# Altium PCB PCB.PcbDoc (part 2 of 2)
Units mil, origin at the board's own origin, x right, y up, seen from the top; angles counter-clockwise.
Board outline 1700 x 700 mil, 4 copper layers (TOP, GND, SIG, BOTTOM), stack 62.441 mil thick; 81 components, 66 nets, 310 pads, 129 vias.
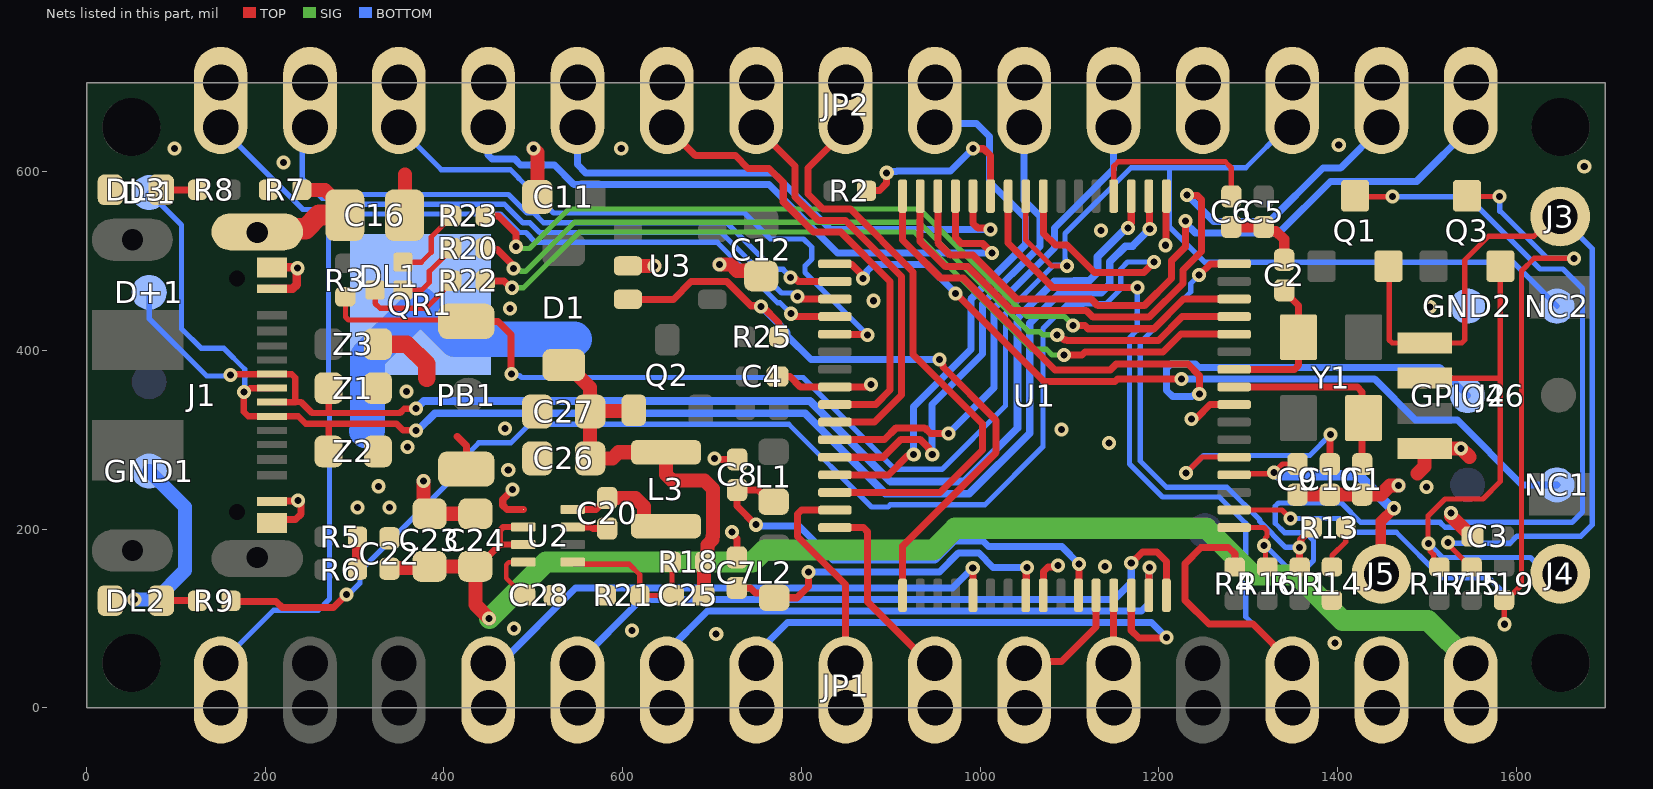
[diagram p4: the nets of this part, all layers, seen from the top]

## Via types
v1: diameter 15.75, hole 7.87, TOP to BOTTOM, tented both sides, 129 vias

## Nets (pads, with @x,y where several pads share a name; then routed paths per layer and width w, separated by ;. In a path a pad name is that pad's centre, name@x,y a point inside that pad or via, vN(x,y) a via of type N, cw(c..) or ccw(c..) an arc to the next point about the centre after c; other vN are vias at no path point) (continued)
GND: C1.2 C2.2 C3.1 C4.1 C5.1 C6.1 C7.1 C8.2 C9.1 C10.1 C11.1 C12.1 C16.1 C22.2 C23.1 C24.1 C26.1 C27.1 C28.1 DL2.C DL3.C GND1.X GND2.X J1.A1 J1.A12 J1.B1 J1.B12 J2.1 JP1.14 JP2.4 PB1.1 QR1.PAD R5.1 R6.1 R7.1 R14.1 R21.1 U1.8 U1.17 U1.40 U1.57 U2.1 U3.2 Z1.2 Z2.2 Z3.2 | length 1856
  TOP w7.87: J1.A12@207.7,206.89 211.53,210.72 233.83,210.72 240.16,217.05 240.16,232.28 v1@238.88,231.01 ; J1.B1@207.8,231.01 208.39,231.59 236.12,231.59 v1(236.81,232.28) ; Z3.2@329.91,407.13 Z3.2@330.12,406.92 ; 414.86,303.77 424.97,293.65 PB1.1@424.97,267.32 ; v1(476.79,244.35) 465.76,233.31 465.76,226.79 470.37,222.18 U2.1@488.91,222.18 ; v1(703.04,279) 703.84,278.2 C8.2@728.05,278.2 ; v1(722.54,197.07) 722.54,194.94 727.75,189.74 727.75,168.48 C7.1@727.84,168.39 ; C8.2@728.05,286.08 C8.2@728.23,285.89 ; C4.1@773.29,370.97 787.13,370.97 798.85,359.25 U1.40@831.69,359.25 ; U1.40@831.39,358.95 U1.40@831.69,359.25 ; v1(877.95,362.2) 875.82,362.2 872.87,359.25 U1.40@837.6,359.25 U1.40@831.69,359.25 ; U1.57@1070.87,125.98 1070.87,152.47 1076.02,157.63 1085.56,157.63 v1(1087.07,159.13) ; v1(1207.83,517.83) 1208.25,518.24 1208.25,578.32 U1.17@1208.66,578.74 ; v1(1236.68,323.19) 1238.18,324.7 1242.78,324.7 1257.65,339.57 U1.8@1284.45,339.57 U1.8@1290.35,339.57
  TOP w9.84: J1.B12@207.7,469.09 230.45,469.09 235.09,473.73 235.09,491 v1(236.22,492.13) 235.24,493.11 J1.A1@207.7,493.11
  TOP w11.81: R6.1@303.2,154.81 R5.1@303.2,191.42 ; v1(500.18,625.91) v1@500.42,625.91 ; C6.1@1281.36,538.23 C5.1@1317.58,538.23 1317.58,537.25 1321.12,533.71 1331.17,533.71 1340.48,524.4 C2.2@1340.48,501.57
  TOP w15.75: C16.1@355.87,551.48 356.55,552.16 356.55,597.01 ; v1(376.85,254.01) 376.85,224.33 C23.1@383.86,217.32 C24.1@435.04,217.32 ; v1(500.18,625.91) 504.49,621.6 C11.1@504.49,571.97 ; U3.2@603.84,494.71 v1@635.44,494.71 ; v1(708.43,496.11) 721.3,496.11 728.12,489.3 749.19,489.3 C12.1@754.96,483.52 ; C9.1@1355.35,238.61 C10.1@1391.57,238.61 C1.2@1427.79,238.61 ; C1.2@1428.81,239.62 1429.83,238.61 1448.89,238.61 1459.07,248.79 v1(1468.51,248.79) ; 1489.6,262.19 1497.62,270.21 J2.1@1497.62,290.35 v1(1538.4,290.35) 1548.16,280.59 ; v1(1527.08,218.05) 1527.08,214.93 1546.64,195.37 1547.62,195.37 C3.1@1551.17,191.83
  TOP w19.68: Z3.2@325.98,407.13 329.91,407.13 358.35,407.13 380.48,385 380.48,369.25
  BOTTOM w15.75: v1(53.29,121.32) 77.53,121.32 110.24,154.03 110.24,224.76 GND1.X@70,265
  BOTTOM w39.37: 313.55,310.2 314.56,311.21 314.56,392.52 QR1.PAD@373.61,451.58 412.63,412.56 545.83,412.56
  other v1: 1397.13,72.75 704.72,82.68 610.24,86.61 478.16,88.77 1139.88,158.18 338.92,224.07 303.15,224.41 326.77,248.03 1499.64,247.17 471.92,266.09 358.97,292.11 1144.55,296.39 1091.06,311.61 468.3,312.58 358.01,354.27 474.01,447.06 1503.94,448.82 880.95,455.73 635.48,494.75 1135.59,534.46 1676.38,605.91 220.47,610.24 98.43,625.98 598.43,625.98 1401.57,629.92
MD_1: JP1.13 R4.2 U1.26 | length 1033.3
  TOP w7.87: U1.26@1031.5,578.74 1031.5,520.31 1081.03,470.77 1175.85,470.77 v1(1176.07,470.55) ; R4.2@1285.3,155.79 1285.3,172.52 1278.22,179.6 1247.58,179.6 1229.69,161.7 1229.69,120.31 1256.33,93.67 1305.74,93.67 JP1.13@1349.41,50
  BOTTOM w5.91: v1(1176.07,470.55) 1176.07,422.71 1167.43,414.07 1167.43,272.91 1204.25,236.08 1267.83,236.08 1297.41,206.51 1297.41,102 JP1.13@1349.41,50
NetC1_1: C1.1 U1.9 Y1.3 | length 228.8
  TOP w7.87: U1.9@1284.45,359.25 1284.52,359.18 1310.11,359.18 ; 1310.04,359.25 1310.11,359.18 ; C1.1@1427.79,272.86 Y1.3@1427.79,322.87 ; Y1.3@1429.33,324.4 Y1.3@1427.79,322.87 ; 1310.11,359.18 1422.35,359.18 1427.79,353.74 Y1.3@1427.79,322.87
NetC2_1: C2.1 U1.10 Y1.1 | length 165.5
  TOP w7.87: U1.10@1284.45,378.94 1351.88,378.94 1356.5,383.55 Y1.1@1356.5,414.97 ; C2.1@1340.48,467.32 1340.48,466.34 1356.5,450.32 Y1.1@1356.5,414.97 ; Y1.1@1357.32,415.79 Y1.1@1356.5,414.97
NetC6_2: C6.2 U1.20 | length 196.1
  TOP w5.91: U1.20@1149.61,578.74 1149.61,606.16 1154.75,611.3 1274.53,611.3 1281.36,604.47 C6.2@1281.36,572.48
NetC7_2: C7.2 L2.2 U1.56 | length 397.9
  TOP w7.87: C7.2@727.84,134.13 743.19,134.13 748.54,128.78 764.08,128.78 L2.2@769.61,123.25 795.21,123.25 807.98,136.02 v1(807.98,151.96) ; U1.56@1051.13,125.98 1051.77,126.62 1051.77,156.36 v1(1052.69,157.28)
  BOTTOM w7.87: v1(807.98,151.96) 954.47,151.96 975.68,173.17 998.83,173.17 1014.71,157.28 v1(1052.69,157.28)
NetC10_2: C10.2 U1.5 | length 279.9
  TOP w5.91: v1(1230.63,262.82) 1248.57,280.76 U1.5@1290.11,280.76
  TOP w7.87: C10.2@1391.57,272.86 1392.02,273.31 1392.02,305.4 v1(1392.46,305.85)
  BOTTOM w5.91: v1(1230.63,262.82) 1250.28,282.47 1369.08,282.47 v1(1392.46,305.85)
NetC20_1: C20.1 L3.1 U2.8 | length 132.1
  TOP w7.87: U2.8@544.03,222.18 569.88,222.18 582.56,234.86 C20.1@582.66,234.86
  TOP w15.75: C20.1@582.66,234.86 614.39,234.86 623.89,225.36 623.89,209.35 629.79,203.44 L3.1@648.49,203.44
NetC20_2: C20.2 U2.7 | length 39.4
  TOP w7.87: U2.7@544.03,202.49 564.66,202.49 566.55,200.61 C20.2@582.66,200.61
NetC25_1: C25.1 R18.1 R21.2 U2.5 | length 179.1
  TOP w5.91: U2.5@544.03,163.12 546,161.15 557.78,161.15 558.31,160.62 607.46,160.62 619.09,148.99 R21.2@619.09,125.89 C25.1@656.1,125.89 655.32,126.67 655.32,162.56 R18.1@654.53,163.35
NetC25_2: C25.2 C26.2 C27.2 D1.A L3.2 Q2.1 R18.2 | length 469.7
  TOP w15.75: D1.A@532.39,383.64 538.49,383.64 563.55,358.59 C27.2@563.55,331.67 ; Q2.1@612.19,332.98 Q2.1@614.82,335.61 ; Q2.1@612.49,333.21 611.72,332.44 564.32,332.44 C27.2@563.55,331.67 ; L3.2@648.49,286.12 595.56,286.12 588.75,279.31 C26.2@563.55,279.31 C27.2@563.55,331.67 ; L3.2@648.49,286.12 648.55,261.28 655.47,254.36 691.81,254.36 701.04,245.14 701.04,192.09 700.74,191.79 700.74,188.37 694.88,182.51 694.88,166.3 R18.2@691.93,163.35 691.14,162.56 C25.2@691.14,126.67 ; C25.2@690.35,125.89 C25.2@691.14,126.67 ; C25.2@691.24,126.77 C25.2@691.14,126.67
NetC28_2: C28.2 U2.4 | length 63.8
  TOP w5: U2.4@488.91,163.12 472.47,163.12 469.54,160.19 469.54,145.12 488.78,125.89 C28.2@489.76,125.89
NetDL1_1: DL1.1 R22.2 | length 116.7
  TOP w5.91: DL1.1@322.93,467.75 322.93,452.76 328.32,447.37 379.68,447.37 408.71,476.41 R22.2@408.71,478.05
NetDL1_2: DL1.2 R20.2 | length 81.6
  TOP w5.91: DL1.2@354.03,467.75 375.14,467.75 383.56,476.17 383.56,488.59 408.71,513.75 R20.2@408.71,514.34
NetDL1_3: DL1.3 R23.2 | length 86.4
  TOP w5.91: DL1.3@354.03,498.85 374.54,498.85 385.68,509.99 385.68,527.01 408.71,550.05 R23.2@408.71,550.64
NetDL2_A: DL2.A R9.1 | length 40.6
  TOP w7.87: DL2.A@83.66,120.08 83.82,119.92 124.02,119.92 R9.1@124.17,119.76
NetDL3_A: DL3.A R8.1 | length 40.5
  TOP w7.87: DL3.A@83.66,579.92 83.72,579.86 R8.1@124.17,579.86
NetR2_2: R2.2 U1.27 | length 206.7
  TOP w7.87: R2.2@874.02,579.93 874.61,579.33 887.34,579.33 895.24,587.23 895.24,598.61 v1(895.59,598.97) ; v1(992.13,625.98) 992.27,625.84 1004.08,625.84 1011.81,618.11 U1.27@1011.81,578.74
  BOTTOM w7.87: v1(895.59,598.97) 896.93,600.3 906.34,600.3 906.93,600.89 967.03,600.89 v1(992.13,625.98)
NetR11_1: R11.1 R13.2 U1.16 | length 557
  TOP w7.87: v1(1245.23,484.34) 1257.94,497.05 U1.16@1290.35,497.05 ; R11.1@1357.74,155.79 1357.63,155.9 1357.63,179.54 v1(1357.52,179.65) 1359.02,181.16 1359.02,188.3 1371.98,201.26 R13.2@1371.98,201.85
  BOTTOM w5.91: v1(1245.23,484.34) 1235.95,475.06 1235.95,465.78 1179.32,409.14 1179.32,276.44 1208.77,246.99 1276.31,246.99 1313.22,210.08 1313.22,208.49 1342.06,179.65 v1(1357.52,179.65)
NetR13_1: R13.1 R14.2 | length 52.5
  TOP w5.91: R14.2@1393.96,155.79 1393.96,170.43 1409.39,185.86 R13.1@1409.39,201.85
P000_AN00_AMP+_1: JP1.5 U1.64 | length 771.9
  TOP w7.87: v1(1169.32,162.04) 1181.88,174.6 1198.01,174.6 1208.66,163.95 U1.64@1208.66,120.08
  BOTTOM w7.87: JP1.5@549.41,50 620.61,121.21 1150.21,121.21 1169.32,140.31 v1(1169.32,162.04)
P001_AN01_AMP-_1: JP1.6 U1.63 | length 653
  TOP w7.87: U1.63@1189.06,120.17 1189.06,156.87 v1(1189.52,157.33)
  BOTTOM w7.87: JP1.6@649.41,50 649.41,62.79 694.95,108.33 1180.86,108.33 1189.18,116.66 1189.18,156.99 v1(1189.52,157.33)
P002_AN02_AMPO_1: JP1.7 U1.62 | length 567.8
  TOP w7.87: U1.62@1169.29,120.08 1169.29,86.61 1177.84,78.06 1207.99,78.06 v1(1208.66,78.74)
  BOTTOM w7.87: JP1.7@749.41,50 749.41,60.43 784.43,95.46 1191.94,95.46 v1(1208.66,78.74)
P003_AN03_1: JP1.11 U1.61 | length 70.2
  TOP w7.87: JP1.11@1149.41,50 1149.51,50.1 1149.51,119.98 U1.61@1149.61,120.08
P004_AN04_1: JP1.10 U1.60 | length 126.8
  TOP w7.87: JP1.10@1049.41,50 1051.26,51.85 1091.22,51.85 1129.92,90.55 U1.60@1129.92,120.08
P014_AN09_DAC_1: JP1.4 U1.53 | length 622.9
  TOP w7.87: v1(991.87,156.36) 992,156.23 992,120.21 U1.53@992.13,120.08
  BOTTOM w7.87: JP1.4@449.41,50 463.17,50 547.25,134.08 969.31,134.08 991.58,156.36 v1(991.87,156.36)
P100_AN22_SCL_1: JP1.9 U1.48 | length 226.5
  TOP w7.87: U1.48@831.69,201.77 869.4,201.77 874.02,197.16 874.02,118.72 942.74,50 JP1.9@949.41,50
P101_AN21_SDA_1: JP1.8 U1.47 | length 227
  TOP w7.87: U1.47@831.69,221.46 800.34,221.46 795.72,216.84 795.72,191.63 849.41,137.94 JP1.8@849.41,50
P102_SPI0_RSPCK_GPT2_B_CAN0_RX_1: JP2.8 U1.46 | length 668.4
  TOP w7.87: U1.46@831.69,241.14 871.06,241.14 955.37,241.14 1002.96,288.73 1002.96,317.6 925.2,395.36 925.2,488.04 854.85,558.39 824.34,558.39 807.55,575.17 807.55,604.28 849.41,646.14 JP2.8@849.41,650
P103_SPI0_SSL_GPT2_A_CAN0_TX_1: JP2.7 U1.45 | length 596.9
  TOP w7.87: U1.45@831.69,260.83 897.69,260.83 919.18,282.32 924.31,282.32 v1(925.82,283.82)
  BOTTOM w7.87: v1(925.82,283.82) 925.82,337.24 989.67,401.1 989.67,457.44 1051.18,518.94 1051.18,548.23 1010.59,588.82 1010.59,639.6 996.25,653.94 953.35,653.94 JP2.7@949.41,650
P104_IRQ01_GPT1_B_1: JP2.6 U1.44 | length 555.3
  TOP w7.87: U1.44@831.69,280.51 891.43,280.51 911.56,300.63 932.78,300.63 942.63,290.79 942.63,289.89 946.56,285.95 v1(946.56,283.82)
  BOTTOM w7.87: v1(946.56,283.82) 946.46,283.93 946.46,339.67 1002.88,396.09 1002.88,452.43 1066.93,516.48 1066.93,550.69 1049.41,568.21 JP2.6@1049.41,650
P105_IRQ00_GPT1_A_1: JP2.5 U1.43 | length 560.5
  TOP w7.87: U1.43@831.69,300.2 892.91,300.2 906.22,313.51 938.11,313.51 944.53,307.09 v1(964.57,307.09)
  BOTTOM w7.87: v1(964.57,307.09) 1015.75,358.27 1015.75,447.1 1083.31,514.65 1083.31,537.15 1149.41,603.26 JP2.5@1149.41,650
P106_GPT0_B_1: JP2.9 U1.42 | length 478.3
  TOP w7.87: JP2.9@749.41,650 792.72,606.69 792.72,571.8 819,545.51 849.52,545.51 912.32,482.7 912.32,350.32 881.89,319.88 U1.42@831.69,319.88
P107_GPT0_A_1: JP2.10 U1.41 | length 530.3
  TOP w7.87: JP2.10@649.41,650 681.3,618.11 726.23,618.11 740.42,603.92 763.86,603.92 779.77,588.01 779.77,566.54 813.67,532.64 844.18,532.64 899.45,477.37 899.45,355.65 883.37,339.57 U1.41@831.69,339.57
P108_SWDIO_1: NC1.X U1.33 | length 934.7
  TOP w7.87: U1.33@832.68,496.06 856.51,496.06 867.66,484.92 867.66,481.91 v1(869.16,480.4) ; v1(972.75,464.03) 972.97,464.03 1071.74,365.27 1151.19,365.27 1153.87,367.95 v1(1225.67,367.95)
  BOTTOM w7.87: v1(869.16,480.4) 869.16,482.53 873.1,486.47 873.1,488.47 880.69,496.06 940.94,496.06 972.75,464.25 v1(972.75,464.03) ; v1(1225.67,367.95) 1441.8,367.95 1487.68,322.08 1534.45,322.08 1606.88,249.65 NC1.X@1645.79,249.65
P109_SCI9_TXD_1: JP2.14 U1.34 | length 703
  TOP w7.87: v1(788.01,481.52) 789.51,480.02 793.9,480.02 796.55,477.36 U1.34@831.69,477.36
  BOTTOM w5.91: JP2.14@250,650 241.39,641.39 241.39,592.61 263.58,570.42 268.47,570.42 272.62,574.57 472.13,574.57 477.76,568.94 492.88,553.82 500.73,553.82 511.63,542.92 716.89,542.92 768.93,490.89 779.62,490.89 788.01,482.51 v1(788.01,481.52)
P110_SCI9_RXD_1: JP2.15 U1.35 | length 766.1
  TOP w7.87: v1(795.91,460.49) 798.04,460.49 800.81,457.72 831.65,457.72 U1.35@831.69,457.68
  BOTTOM w5.91: JP2.15@150,650 242.04,557.96 271.43,557.96 277.14,563.66 467.61,563.66 473.24,558.03 488.36,542.92 496.22,542.92 507.12,532.02 710.33,532.02 777.95,464.41 789.87,464.41 793.78,460.49 v1(795.91,460.49)
P111_GPT3_A_1: JP1.1 U1.36 | length 1185.2
  TOP w7.87: v1(788.31,441.18) 790.44,441.18 793.63,437.99 U1.36@831.69,437.99
  BOTTOM w5.91: JP1.1@150,50 209.28,109.28 259.26,109.28 271.79,121.81 271.79,354.64 270.67,355.77 270.67,541.77 281.66,552.76 463.1,552.76 483.84,532.01 491.7,532.01 502.6,521.11 705.82,521.11 773.43,453.5 776.13,453.5 788.31,441.32 v1(788.31,441.18)
P112_GPT3_B_1: JP2.13 U1.37 | length 691.3
  TOP w7.87: U1.37@831.69,418.31 832.19,417.81 873.52,417.81 v1(874.02,417.32)
  BOTTOM w5.91: JP2.13@349.41,650 397.05,602.36 474.34,602.36 483.75,592.95 483.75,592.82 522.74,553.83 736.34,553.83 765.32,524.85 802.5,524.85 811.77,515.58 811.77,502.47 804.08,494.78 804.08,487.26 v1(874.02,417.32)
P204_1: R9.2 U1.24 | length 1572.4
  TOP w7.87: R9.2@161.57,119.76 162.11,119.23 212.07,119.23 218.9,112.39 276.52,112.39 v1(290.89,126.76) ; U1.24@1070.87,578.74 1071.27,578.34 1071.27,531.09 1084.37,518 1097.59,518 1128.22,487.36 1183.3,487.36 v1(1194.96,499.02)
  BOTTOM w5.91: v1(290.89,126.76) 293.06,126.76 305.9,139.59 305.9,153.21 422.99,270.3 422.99,280.72 439.02,296.75 474.86,296.75 495.61,317.5 785.97,317.5 878.72,224.75 896.91,224.75 899.49,227.33 1005.53,227.33 1070.61,292.41 1070.61,424.51 1097.47,451.37 1115.17,451.37 1116.1,452.3 1140.9,452.3 1157.53,468.93 1157.53,491.28 1165.27,499.02 v1(1194.96,499.02)
P300_SWCLK_1: GPIO46.X U1.32 | length 895.2
  TOP w7.87: U1.32@913.39,578.74 913.39,523.62 956.05,480.96 981.31,480.96 1084.12,378.14 1145.85,378.14 1152.48,384.76 1232.64,384.76 1245.45,371.95 v1(1245.45,351.14)
  BOTTOM w7.87: v1(1245.45,351.14) 1243.94,349.64 1238.38,349.64 1237.13,348.39 1215.69,348.39 1208.86,355.22 1208.86,380.15 1213.47,384.76 1241.07,384.76 1245.01,380.83 1514.61,380.83 GPIO46.X@1545.79,349.65
P301_SCI2_RXD_1: JP2.2 U1.31 | length 795.9
  TOP w7.87: U1.31@933.07,578.74 933.07,522.14 961.38,493.83 986.64,493.83 1035.44,445.02 1118.75,445.02 1126.51,437.26 1189.23,437.26 1227.12,475.15 1227.12,490 1247.88,510.77 1247.88,569.06 1243.27,573.68 1232.17,573.68 v1(1231.68,574.17)
  BOTTOM w7.87: v1(1231.68,574.17) 1261.21,544.64 1324.34,544.64 1384.07,604.37 1403.78,604.37 JP2.2@1449.41,650
P302_SCI2_TXD_1: JP2.1 U1.30 | length 806.9
  TOP w7.87: U1.30@952.76,578.74 952.76,520.66 966.72,506.7 991.97,506.7 1040.78,457.9 1124.08,457.9 1131.84,450.14 1183.9,450.14 1214.25,480.48 1214.25,500.47 1229.88,516.1 v1(1229.88,544.82)
  BOTTOM w7.87: v1(1229.88,544.82) 1229.88,542.84 1240.95,531.76 1334.8,531.76 1392.25,589.21 1489.41,589.21 ; 1489.41,590 JP2.1@1549.41,650
P303_GPT7_B_1: JP2.12 U1.29 | length 740.7
  TOP w7.87: U1.29@972.44,578.74 972.44,526.48 979.34,519.58 1003.07,519.58 v1(1013.29,509.36)
  BOTTOM w7.87: JP2.12@449.41,650 449.41,618.86 454.02,614.25 479.27,614.25 485.75,607.77 523.56,607.77 545.31,586.02 763.65,586.02 840.41,509.26 1013.19,509.26 v1(1013.29,509.36)
P304_GPT7_A_1: JP2.11 U1.28 | length 593.3
  TOP w7.87: U1.28@992.13,578.74 992.13,542.32 997.51,536.94 1010.3,536.94 v1(1011.81,535.43)
  BOTTOM w7.87: JP2.11@549.41,650 549.41,608.19 558.7,598.9 768.98,598.9 832.44,535.43 v1(1011.81,535.43)
P400_IIC0_SCL_1: Q1.3 R16.2 U1.1 | length 1150.4
  TOP w5.91: U1.1@1290.35,201.77 1317.91,201.77 1321.37,198.31 1321.37,192.18 1319.64,190.45 1319.64,183.37 v1(1317.76,181.49) 1319.64,179.61 1319.64,157.67 R16.2@1321.52,155.79 ; Q1.3@1419.85,573.19 1420.76,572.27 v1(1461.81,572.27)
  BOTTOM w5.91: v1(1317.76,181.49) 1319.43,181.49 1343.4,157.52 1365.99,157.52 1373.34,164.87 1373.34,187.38 1364.58,196.14 1340.99,196.14 1330.52,206.61 1330.52,225.64 1334.09,229.2 1404.67,229.2 1426.24,207.63 1515.12,207.63 1520.53,202.22 1533.64,202.22 1539.05,207.63 1662.71,207.63 1674.33,219.25 1674.33,469.48 1652.67,491.14 1626.99,491.14 1545.07,573.06 ; v1(1461.81,572.27) 1545.07,572.27
P401_IIC0_SDA_1: Q3.3 R19.2 U1.2 | length 996.6
  TOP w5.91: U1.2@1290.35,221.46 1338.06,221.46 v1(1347.41,212.1) ; Q3.3@1545.16,573.19 1546.03,572.32 v1(1581.28,572.32) ; v1(1587.08,93.61) 1586.85,93.84 1586.85,118.16 1586.61,118.39 1587.2,118.39 1606.19,137.38 1606.19,476.47 ; 1606.19,475.68 1606.26,475.75 1606.26,488.23 ; 1606.26,489.01 1620.47,503.23 v1(1664.82,503.23)
  BOTTOM w5.91: v1(1347.41,212.1) 1347.54,211.97 1403.28,211.97 1418.69,196.56 1465.99,196.56 1516.79,145.75 1569.34,145.75 1587.08,128.01 v1(1587.08,93.61) ; v1(1581.28,572.32) 1581.76,571.84 1581.76,555.94 ; 1581.76,556.73 1635.26,503.23 v1(1664.82,503.23)
P409_1: R23.1 U1.14 | length 955.6
  TOP w7.87: R23.1@446.11,550.64 460.88,550.64 480.43,531.08 v1(480.43,516.19) ; v1(1104.24,428.21) 1117.35,428.21 1121.18,424.39 1194.56,424.39 1227.85,457.68 U1.14@1284.45,457.68 U1.14@1290.35,457.68
  SIG w5.91: v1(480.43,516.19) 482.31,514.3 495.55,514.3 539.65,558.4 932.23,558.4 1052.64,437.99 1094.46,437.99 v1(1104.24,428.21)
P410_1: R20.1 U1.13 | length 945.3
  TOP w7.87: R20.1@446.11,514.34 447.23,513.22 459.62,513.22 476.4,496.44 476.4,493.37 v1(477.91,491.86) ; v1(1086.44,417.56) 1088.57,417.56 1094.36,411.76 1096.92,411.76 1097.28,411.4 1199.78,411.4 1226.37,437.99 U1.13@1290.35,437.99
  SIG w5.91: v1(477.91,491.86) 479.79,489.98 484.89,489.98 486.29,488.58 491.18,488.58 546.23,543.63 931.58,543.63 1054.1,421.11 1066.75,421.11 1070.3,417.56 v1(1086.44,417.56)
P411_1: R22.1 U1.12 | length 940.1
  TOP w7.87: R22.1@446.11,478.05 446.39,477.77 467.01,477.77 474.5,470.28 v1(476.22,470.28) ; v1(1093.81,394.95) 1114.13,394.95 1117.43,398.25 1204.84,398.25 1224.9,418.31 U1.12@1290.35,418.31
  SIG w5.91: v1(476.22,470.28) 489.1,470.28 551.54,532.72 926.45,532.72 1057.59,401.57 1074.13,401.57 1080.75,394.95 v1(1093.81,394.95)
P500_1: R25.1 U1.49 U3.3 | length 779.7
  TOP w7.87: U3.3@603.84,457.31 656.72,457.31 676.48,477.08 716.56,477.08 743.53,450.12 754.43,450.12 v1(755.09,449.46) ; v1@755.74,450.12 775.21,430.65 R25.1@775.21,415.25 ; U1.49@913.39,120.08 913.39,180.95 1018.04,285.6 1018.04,321.91 958.42,381.53 958.42,383.78 954.57,387.63 v1(954.57,389.76)
  BOTTOM w7.87: v1(755.09,449.46) 755.09,449.3 783.97,420.42 783.97,416.48 810.68,389.76 v1(954.57,389.76)
R\E\S\E\T\_1: JP2.3 NC2.X PB1.2 R3.1 U1.25 | length 2069.8
  TOP w5.91: R3.1@289.68,460.16 289.68,437.54 293.14,434.08 423.56,434.08 PB1.2@424.97,432.68 PB1.2@429.33,432.68 ; U1.25@1051.18,578.74 1051.18,523.62 1080.29,494.51 v1(1097.3,494.51)
  TOP w7.87: R3.1@289.55,460.16 R3.1@289.68,460.16 ; PB1.2@429.33,432.68 PB1.2@433.69,432.68 ; PB1.2@435.37,432.46 460.41,432.46 474.99,417.88 474.99,374.38 v1(475.48,373.89)
  BOTTOM w5.91: v1(475.48,373.89) 477.37,372 484.57,372 486.68,369.89 802.05,369.89 904.93,267.01 957.5,267.01 1028.63,338.14 1028.63,441.7 1082.38,495.45 v1@1096.37,495.45 ; v1(1097.3,494.51) 1095.42,496.4 1095.42,502.68 1095.2,502.9 1095.2,530.84 1168.93,604.57 1212.23,604.57 ; JP2.3@1349.41,650 1342.93,650 1297.5,604.57 1212.23,604.57 ; NC2.X@1645.79,449.65 1596.53,498.9 1251.44,498.9 1212.23,538.11 1212.23,604.57
SCL_3V3_1: J2.4 J3.1 Q1.2 R15.2 | length 957.9
  TOP w5.91: Q1.2@1457.25,494.45 Q1.2@1457.95,493.75 ; Q1.2@1457.95,494.53 1457.95,411.92 1461.41,408.46 J2.4@1497.62,408.46 1539.21,408.46 1542.67,411.92 1542.67,501.16 1569.4,527.89 1620.02,527.89 1642.12,550 J3.1@1649.41,550 ; v1(1524.09,185.34) 1524.09,182.89 1550.39,156.59 R15.2@1550.39,155.79
  BOTTOM w5.91: v1(1524.09,185.34) 1525.1,184.33 1593.32,184.33 1601.19,192.21 1672.7,192.21 1685.24,204.75 1685.24,514.17 J3.1@1649.41,550
SDA_3V3_1: J2.3 J4.1 Q3.2 R17.2 | length 659.5
  TOP w5.91: J2.3@1500.64,372.11 J2.3@1497.62,369.09 1581.89,369.09 ; v1@1501.59,184.21 1501.59,214.93 1520.53,233.87 1562.95,233.87 1582.36,253.28 Q3.2@1582.36,495.04 ; v1(1501.87,183.92) 1503.76,182.04 1503.76,175.42 1507.93,171.24 1507.93,164 R17.2@1513.89,158.05 ; J4.1@1649.41,150 J4.1@1649.41,159.42
  BOTTOM w5.91: v1(1501.87,183.92) 1517.57,168.22 1616.13,168.22 1634.35,150 J4.1@1649.41,150
USB_D_1_N: D-1.X J1.A7 J1.B7 U1.18 Z2.1 | length 1688.3
  TOP w7.09: J1.B7@207.7,357.87 183.03,357.87 178.6,353.44 v1(176.26,353.44) 175.99,353.18 175.99,331.39 181.01,326.38 J1.A7@207.7,326.38 236.94,326.38 244.9,318.41 ; 245.4,317.91 270.87,317.91 346.81,317.91 354.1,310.62 v1(368.86,310.62) ; Z2.1@270.87,287.01 270.87,317.18
  TOP w7.87: U1.18@1188.98,578.74 1189.5,578.22 1189.5,536.76 v1(1190.02,536.23)
  BOTTOM w5.91: D-1.X@70,576.81 106.3,540.51 106.3,424.4 128.08,402.62 153.33,402.62 176.96,378.99 176.96,354.15 v1(176.26,353.44)
  BOTTOM w8.66: v1(368.86,310.62) 370.78,310.62 389.94,329.79 804.04,329.79 894.22,239.61 987.63,239.61 1055.56,307.54 1055.56,430.54 1088.66,463.65 1110.08,463.65 1111.02,464.58 1135.81,464.58 1145.25,474.02 1145.25,499.27 1162.8,516.82 1170.61,516.82 v1(1190.02,536.23)
USB_D_1_P: D+1.X J1.A6 J1.B6 U1.19 Z1.1 | length 1525
  TOP w7.09: v1(161.14,372.43) 162.33,373.62 J1.A6@206.85,373.62 ; J1.B6@207.7,342.13 233.6,342.13 ; J1.A6@207.7,373.62 229.45,373.62 233.6,369.47 233.6,342.34 239.92,342.34 252.27,330 350.71,330 355.66,334.95 v1(368.86,334.95) ; Z1.1@270.87,357.87 270.87,330.24 271.1,330
  TOP w7.87: v1(1165.87,537.33) 1165.87,539.46 1169.29,542.88 U1.19@1169.29,578.74
  BOTTOM w5.91: D+1.X@70,465 70,436 134.49,371.51 160.21,371.51 v1(161.14,372.43)
  BOTTOM w8.66: v1(368.86,334.95) 368.99,334.95 377.48,343.45 809.7,343.45 899.88,253.27 981.97,253.27 1041.89,313.19 1041.89,436.2 1083,477.31 1104.42,477.31 1105.36,478.24 1122.15,478.24 1131.58,487.68 1131.58,504.93 1163.99,537.33 v1(1165.87,537.33)
USB_SHIELD_1: C16.2 J1.SHIELD1 R7.2 | length 169.3
  TOP w15.75: R7.2@240.98,579.84 266.61,579.84 288.95,557.51 C16.2@288.95,551.48
  TOP w23.62: J1.SHIELD1@190.97,531.89 195.34,536.26 244.77,536.26 259.99,551.48 C16.2@288.95,551.48
VBATT_1: C9.2 J5.1 U1.4 | length 300.3
  TOP w5.91: U1.4@1290.35,260.83 1291.62,262.1 1327.91,262.1 1338.68,272.86 C9.2@1355.35,272.86
  TOP w11.81: J5.1@1448.82,150 1448.82,208.8 v1(1463.48,223.46)
  BOTTOM w11.81: v1(1329.18,263.37) 1330.25,263.37 1333.42,260.19 1423.85,260.19 1459.83,224.21 1462.73,224.21 v1(1463.48,223.46)
VIN: C22.1 C23.2 C24.2 JP1.15 U2.2 U2.3 | length 1472.4
  TOP w7.09: C24.2@435.17,155.31 462.67,182.81 ; U2.3@488.91,182.81 462.67,182.81 ; U2.2@488.91,202.49 466.48,202.49 462.33,198.34 462.33,183.14 462.67,182.81
  TOP w15.75: C22.1@339.95,156.58 382.17,156.58 C23.2@383.86,158.27 C24.2@435.04,158.27 435.04,115.48 v1(450.49,100.03)
  SIG w23.62: v1@450.94,100.03 514.26,163.35 745.44,163.35 758.74,176.65 947.71,176.65 972.08,201.01 1253.44,201.01 1305.68,148.78 1354.63,148.78 1405.67,97.74 1501.67,97.74 JP1.15@1549.41,50
VREFH0_1: C8.1 L1.2 U1.59 | length 533
  TOP w7.87: C8.1@727.88,243.41 727.88,226 748.87,205.01 v1(749.07,205.01) ; C8.1@727.88,251.28 C8.1@728.23,251.64 ; C8.1@728.23,243.77 751.74,243.77 L1.2@764.7,230.81 ; L1.2@764.7,238.69 L1.2@769,238.69 ; U1.59@1110.24,120.08 1110.62,120.46 1110.62,160.73 v1(1111,161.12)
  BOTTOM w7.87: v1(749.07,205.01) 750.58,203.5 756.14,203.5 756.28,203.37 797.58,203.37 835.38,165.57 949.87,165.57 971.12,186.82 1003.39,186.82 1009.65,180.55 1091.57,180.55 v1(1111,161.12)
pads on no net: Fiducial_1.1 Fiducial_2.1 J1.A8 J1.B8 J1.FIXING J1.SHIELD2 J1.SHIELD3 J1.SHIELD4 J2.FIX U1.3 U1.6 U1.7 U1.15 U1.22 U1.23 U1.38 U1.50 U1.51 U1.52 U1.54 U1.55 U1.58 U2.6 U3.4 Y1.2 Y1.4

## Polygon pours and split planes (outlines as drawn)
GND on TOP "GND_TOP" (solid, remove dead copper, pour order 22): 0,700 0,0 1700,0 1700,700
+VBUS on TOP "+5V_TOP" (solid, remove dead copper, pour order 19): 234.36,240.02 119.49,239.77 119.49,444.64 125.88,451.02 234.36,450.98
+5V on SIG "PWR_MID" (solid, remove dead copper, pour order 21): 0,700 0,0 1353.8,0 1353.8,700
+3V3 on SIG "3V3" (solid, remove dead copper, pour order 20): 1700,700 1353.8,700 1353.8,54.39 1349.41,50 1350,49.41 1350,0 1700,0
GND on GND "GND_MID" (solid, remove dead copper, pour order 0): 0,700 0,0 1700,0 1700,700
GND on BOTTOM "GND_BOT" (solid, remove dead copper, pour order 12): 0,700 0,0 1700,0 1700,700

## Keep-outs
Keep-Out Layer:
  rectangle: 1586.61,350 1700,505.68
  rectangle: 1586.61,194.32 1700,350

## Other copper
TOP:
  rectangle net +5V: 674.35,330.46 741,425.2
  region: 124.04,91.3 124.04,91.19 124.15,91.19 124.15,91.3
  pour cut-out: 251.97,562.99 251.97,503.94 192.91,503.94 192.91,452.76 122.05,452.76 122.05,237.03 186.07,237.03 186.07,196.85 248.03,196.85 248.03,140.23 0,140.23 0,562.21
GND:
  pour cut-out: 251.97,562.99 251.97,503.94 192.91,503.94 192.91,452.76 126.69,452.76 126.69,237.03 192.91,237.03 192.91,202.84 248.03,202.84 248.03,136.85 0,136.85 0,562.99
SIG:
  pour cut-out: 251.97,562.99 251.97,503.94 192.91,503.94 192.91,452.76 122.05,452.76 122.05,237.03 186.07,237.03 186.07,196.85 248.03,196.85 248.03,140.23 0,140.23 0,562.21
BOTTOM:
  rectangle net GND: 283.46,361.07 457.77,534.75
  region: 860 vertices and 0 holes, not listed, extent 81.82,55.6 124.04,91.3
  region: 1407 vertices and 1 holes, not listed, extent 1587.28,585.92 1622.59,636.96
  region: 365 vertices and 0 holes, not listed, extent 1589.83,636.39 1609.54,653.83
  pour cut-out: 251.97,562.99 251.97,503.94 192.91,503.94 192.91,452.76 122.05,452.76 122.05,237.03 186.07,237.03 186.07,196.85 248.03,196.85 248.03,140.23 0,140.23 0,562.21

## Silkscreen, mask and mechanical layers (free items; w line width, h text height)
Route Tool Path:
  lines w78.74: -39.37,39.37 -39.37,0 ccw(c0,0) 0,-39.37 1700,-39.37 ccw(c1700,0) 1739.37,0 1739.37,255.91 ; -39.37,196.85 -39.37,511.81 ; -39.37,669.29 -39.37,700 cw(c0,700) 0,739.37 1700,739.37 cw(c1700,700) 1739.37,700 1739.37,413.39
Board:
  the board outline again, w3.94
Mechanical 7:
  lines w3.94: 46.96,465 70,465 ; 46.96,565 70,565 ; 70,441.96 70,465 ; 70,488.04 70,465 ; 70,541.96 70,565 ; 70,588.04 70,565 ; 93.04,465 70,465 ; 93.04,565 70,565
AZUKI_TESTPOINTS:
  drawing of 156 lines, arcs and shapes, not listed
Nano_MECHANICAL_QUOTES_TP:
  drawing of 309 lines, arcs and shapes, not listed
  text "D12" at 135.24,596.06 h11.81
  text "D11" at 237.2,596.06 h11.81
  text "D10" at 335.23,596.06 h11.81
  text "D9" at 440.15,596.06 h11.81
  text "D9" at 440.15,596.06 h11.81
  text "D8" at 540.14,596.06 h11.81
  text "D7" at 640.15,596.06 h11.81
  text "D6" at 740.14,596.06 h11.81
  text "D5" at 839.56,596.06 h11.81
  text "D4" at 939.56,596.06 h11.81
  text "D3" at 1040.15,596.06 h11.81
  text "D2" at 1140.14,596.06 h11.81
  text "GND" at 1234.24,596.06 h11.81
  text "NRST" at 1328.33,596.06 h11.81
  text "D1" at 1442.12,596.06 h11.81
  text "D0" at 1540.15,596.06 h11.81
  text "RX" at 1440.15,572.44 h11.81
  text "TX" at 1540.15,572.44 h11.81
  text "USB DN" at 98.42,555.51 h11.81
  text "USB DP" at 98.42,443.35 h11.81
  text "GND" at 1482.8,443.74 h11.81
  text "D13" at 1583.78,443.74 h11.81
  text "D13" at 1483.78,343.75 h11.81
  text "D13" at 1583.78,343.75 h11.81
  text "D13" at 1483.78,243.75 h11.81
  text "D13" at 1583.78,243.75 h11.81
  text "VUSB" at 1230.12,227.99 h11.81
  text "D13" at 135.24,118.9 h11.81
  text "VREF OR" at 310.64,118.9 h11.81
  text "VBUS" at 1228.33,118.9 h11.81
  text "NRST OR" at 1310.64,118.9 h11.81
  text "SCK" at 134.26,95.28 h11.81
  text "OTHER" at 322.44,95.28 h11.81
  text "5V" at 1240.14,95.28 h11.81
  text "OTHER" at 1322.44,95.28 h11.81
  text "3V3" at 234.25,91.34 h11.81
  text "A0" at 440.15,91.34 h11.81
  text "A0" at 440.15,91.34 h11.81
  text "A1" at 542.11,91.34 h11.81
  text "A2" at 640.15,91.34 h11.81
  text "A3" at 740.14,91.34 h11.81
  text "A6" at 1040.15,91.34 h11.81
  text "A7" at 1140.14,91.34 h11.81
  text "GND" at 1434.24,91.34 h11.81
  text "VIN" at 1535.22,91.34 h11.81
  text "A4" at 839.56,91 h11.81
  text "A5" at 939.56,91 h11.81

## Dimensions
0,0 to 70,465 on Mechanical 16
0,0 to 150,50 on Mechanical 16
0,0 to 50,50 on Mechanical 16
0,0 to 50,650 on Mechanical 16
0,0 to 71.26,577.16 on Mechanical 16
0,0 to 70,465 on Mechanical 16
0,0 to 50,50 on Mechanical 16
0,0 to 0,700 on Mechanical 16
0,0 to 1700,0 on Mechanical 16